# Altium PCB WirelessLamp.PcbDoc (part 2 of 2)
Units mm, origin at the board's own origin, x right, y up, seen from the top; angles counter-clockwise.
Board outline 95.76 x 95.69 mm, 2 copper layers (Top Layer, Bottom Layer); 124 components, 86 nets, 387 pads, 228 vias.
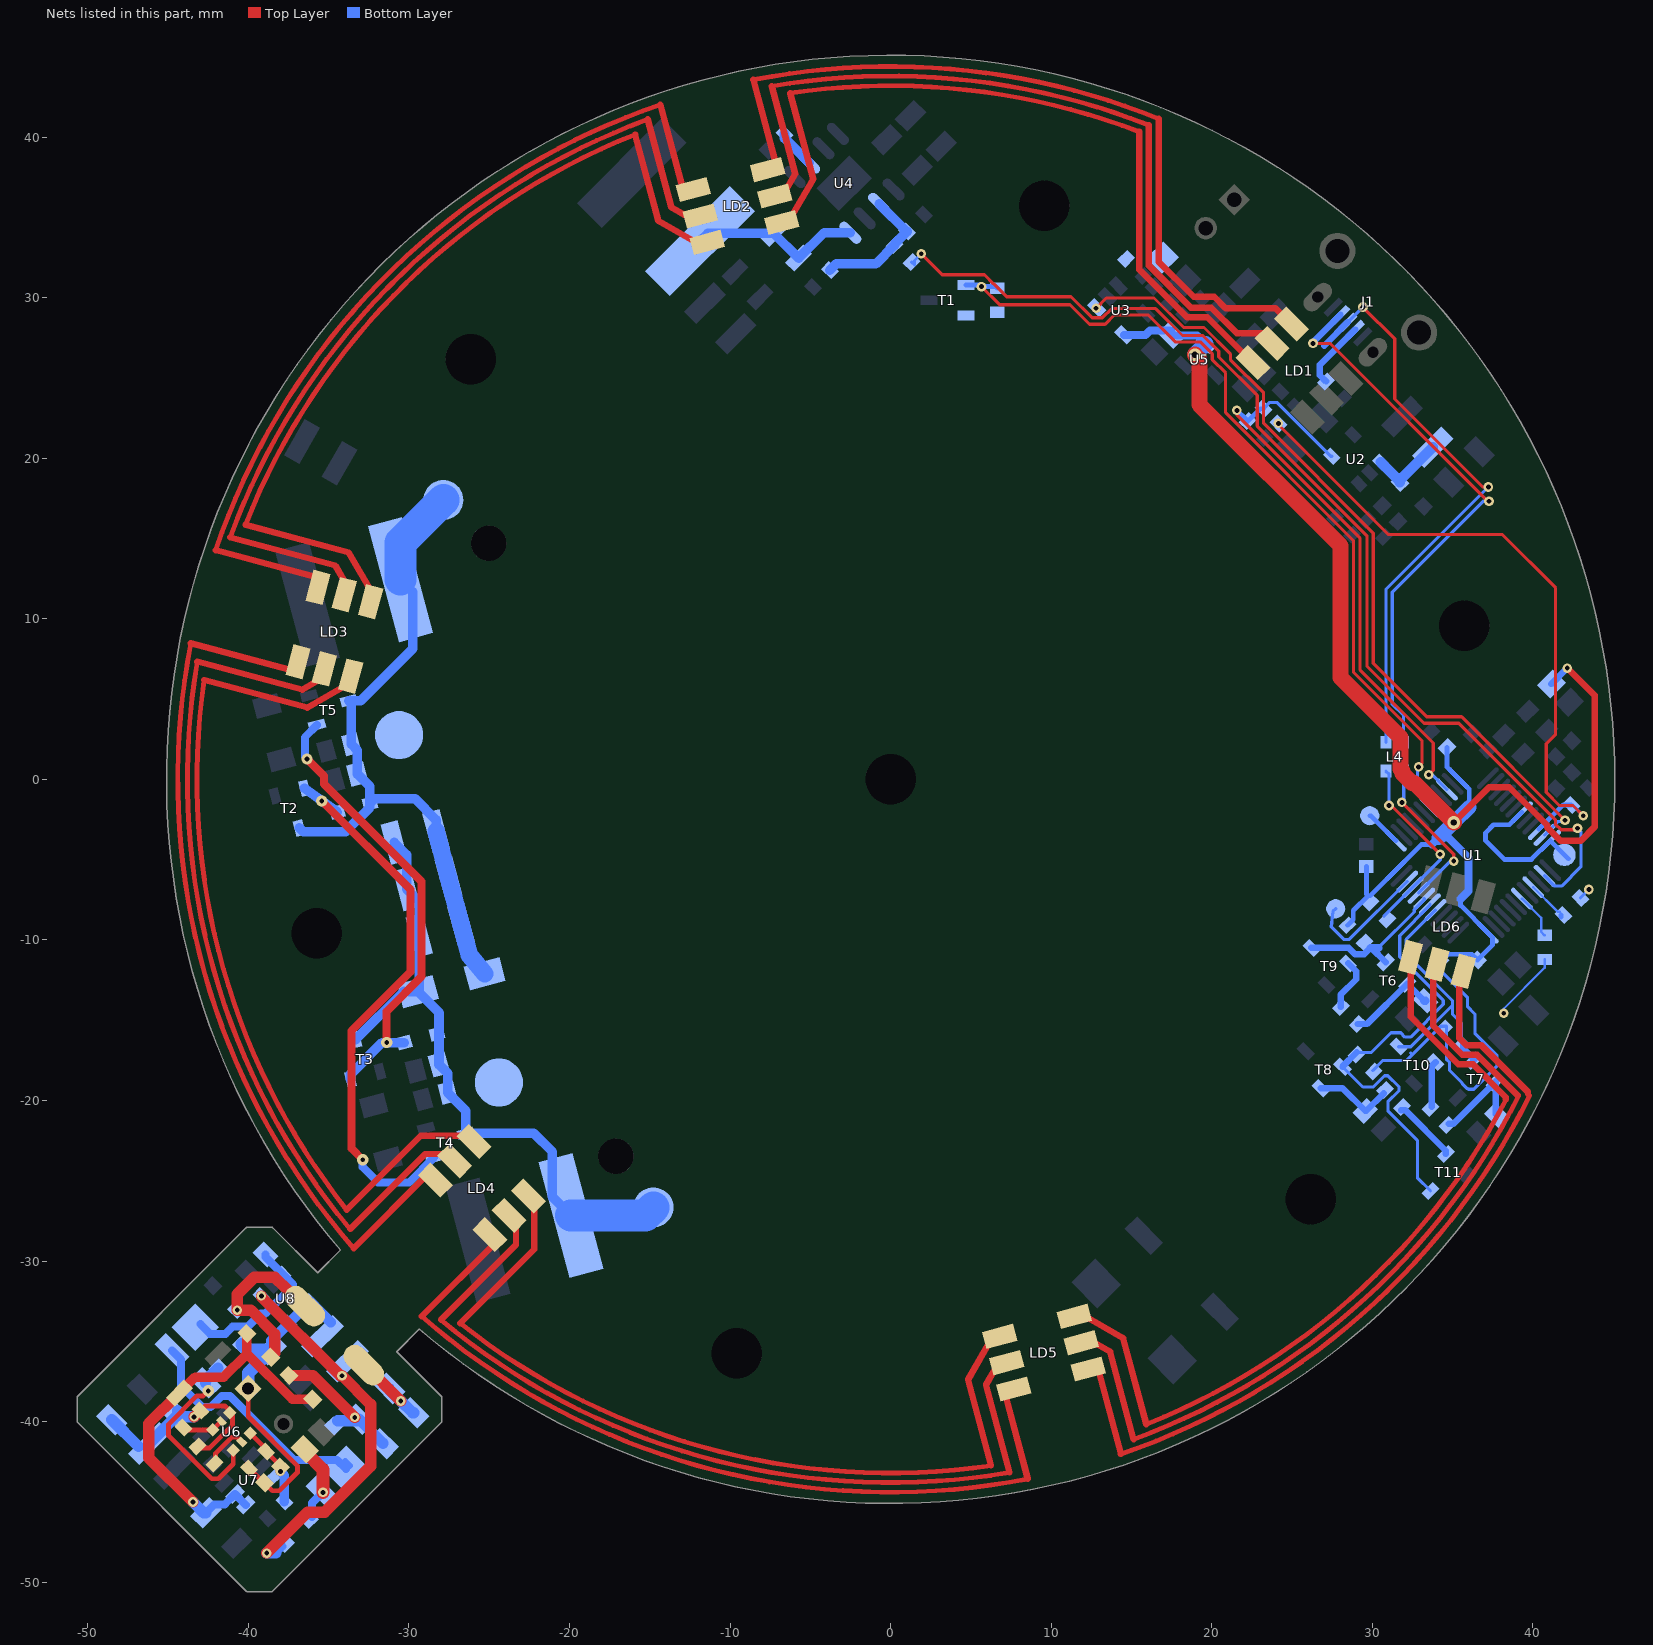
[diagram p2: the nets of this part, all layers, seen from the top]

## Via types
v1: diameter 0.7, hole 0.3, Top Layer to Bottom Layer, tented both sides, 104 vias
v2: diameter 0.8, hole 0.4, Top Layer to Bottom Layer, tented both sides, 71 vias
v3: diameter 0.6, hole 0.3, Top Layer to Bottom Layer, tented both sides, 41 vias
v4: diameter 0.6, hole 0.3, Top Layer to Bottom Layer, tented top, 9 vias
v5: diameter 0.7, hole 0.3, Top Layer to Bottom Layer, tented top, 1 vias
v6: diameter 0.6, hole 0.3, Top Layer to Bottom Layer, tented bottom, 1 vias
v7: diameter 0.6, hole 0.3, Top Layer to Bottom Layer, 1 vias

## Nets (pads, with @x,y where several pads share a name; then routed paths per layer and width w, separated by ;. In a path a pad name is that pad's centre, name@x,y a point inside that pad or via, vN(x,y) a via of type N, cw(c..) or ccw(c..) an arc to the next point about the centre after c; other vN are vias at no path point) (continued)
NetC28_1: C28.1 D13.2 LD7.2 | length 4.7
  Top Layer w0.8: C28.1@-36.418,-41.933 -35.357,-42.994 v4(-35.357,-44.408)
  Bottom Layer w0.5: D13.2@-36.029,-45.928 -36.029,-45.08 v4(-35.357,-44.408)
NetC29_1: C29.1 C30.2 D9.1 D14.2 | length 8.7
  Top Layer w0.7: D9.1@-37.478,-37.125 -35.99,-37.125 v4(-33.375,-39.739)
  Bottom Layer w0.5: C30.2@-33.223,-39.953 C30.2@-33.115,-39.846 ; C29.1@-31.609,-41.367 C29.1@-31.609,-41.352
  Bottom Layer w0.7: -34.435,-39.953 C30.2@-33.223,-39.953 ; C30.2@-33.115,-39.846 C29.1@-31.609,-41.352
NetC31_2: C31.2 D9.2 D11.2 D15.2 U7.4 U7.5 | length 25.1
  Top Layer w0.6: D11.2@-44.373,-38.15 D11.2@-44.231,-38.15 ; D11.2@-44.302,-38.221 D11.2@-44.231,-38.15 ; D11.2@-44.09,-38.15 D11.2@-44.231,-38.15 ; D15.2@-40.095,-34.508 -40.095,-34.968 -40.095,-35.781 ; D9.2@-35.993,-38.61 -37.266,-38.61 -40.095,-35.781 ; D11.2@-44.231,-38.15 -43.312,-37.231 -41.544,-37.231 -40.095,-35.781
  Top Layer w0.7: D11.2@-44.302,-38.221 -46.211,-40.13 -46.211,-42.251 v3(-43.453,-45.009)
  Bottom Layer w0.5: C31.2@-42.64,-45.681 -42.11,-45.15 -41.473,-45.15 U7.5@-40.837,-44.514 U7.4@-40.165,-45.186
  Bottom Layer w0.7: v3(-43.453,-45.009) -42.782,-45.681 C31.2@-42.64,-45.681
NetC32_2: C32.2 L8.2 R31.2 R32.1 R33.1 U6.4 | length 12.8
  Top Layer w0.3: R32.1@-43.277,-41.65 -42.428,-41.65 -40.982,-40.204 -40.982,-39.631 U6.4@-41.155,-39.458 -41.155,-39.317 -41.44,-39.032 -42.709,-39.032 R31.2@-42.994,-39.317
  Top Layer w0.7: v6(-43.383,-39.706) R31.2@-42.994,-39.317
  Bottom Layer w0.7: C32.2@-48.509,-39.882 L8.2@-46.839,-41.553 ; L8.2@-46.174,-41.366 -44.408,-39.6 -44.408,-39.317 -44.019,-39.706 v6(-43.383,-39.706)
NetC34_1: C34.1 R34.1 R35.2 U6.3 U7.3 | length 5.1
  Top Layer w0.3: U6.3@-39.882,-40.731 -39.034,-41.579 -39.034,-41.721 C34.1@-38.009,-42.746
  Top Layer w0.6: v7(-38.009,-43.1) C34.1@-38.009,-42.746
  Bottom Layer w0.6: v7(-38.009,-43.1) -37.761,-43.347 R35.2@-37.761,-44.974
NetD2_1: D2.1 L3.2 U2.1 | length 4.7
  Bottom Layer w0.65: U2.1@30.512,19.764 D2.1@31.714,18.562 ; D2.1@31.714,18.491 D2.1@31.714,18.562 ; L3.2@33.764,20.683 31.714,18.632 D2.1@31.714,18.562
NetD4_1: D4.1 T2.2 T4.1 | length 34.9
  Top Layer w0.5: v1(-35.426,-1.344) -29.912,-6.857 -29.912,-11.987 -33.588,-15.662 -33.588,-22.981 v1(-32.88,-23.688)
  Bottom Layer w0.5: v1(-32.88,-23.688) -32.88,-24.138 -31.916,-25.102 -29.985,-25.102 T4.1@-28.442,-23.56
  Bottom Layer w0.6: T2.2@-36.503,-0.552 -35.423,-1.339 D4.1@-34.46,-2.04
NetD5_1: D5.1 T3.2 T5.1 | length 28.5
  Top Layer w0.5: v1(-36.345,1.273) -35.285,0.212 -35.285,-0.283 -29.212,-6.355 -29.212,-12.277 -31.384,-14.449 v1(-31.384,-16.394)
  Bottom Layer w0.5: v1(-36.345,1.273) -36.487,1.414 -36.487,2.62 T5.1@-35.725,3.381
  Bottom Layer w0.6: T3.2@-33.642,-18.681 -33.642,-18.368 -31.667,-16.394 v1(-31.384,-16.394) D5.1@-30.288,-16.394
NetD7_1: D7.1 D8.1 L5.2 U4.8 | length 10.9
  Bottom Layer w0.6: L5.2@-11.879,33.517 -11.384,34.012 D8.1@-7.283,34.012 D7.1@-5.728,32.456 -4.14,34.044 U4.8@-2.514,34.044
NetD12_1: D12.1 R33.2 U6.1 | length 11.7
  Top Layer w0.3: v5(-42.497,-38.086) -42.812,-38.401 -43.209,-38.401 -44.972,-40.164 -44.972,-40.871 -42.285,-43.558 -41.861,-43.558 -40.943,-42.64 U6.1@-40.943,-41.792
  Bottom Layer w0.7: R33.2@-42.674,-37.583 -42.674,-37.441 D12.1@-41.896,-36.663
NetD13_1: D13.1 L7.2 U8.1 | length 23.4
  Top Layer w0.7: v4(-39.19,-32.173) -39.19,-32.231 -34.282,-37.139 v4(-34.169,-37.139) -32.385,-38.923 -32.385,-42.78 -35.251,-45.645 -36.312,-45.645 v3(-38.857,-48.191)
  Bottom Layer w0.5: -38.291,-48.191 D13.1@-37.867,-47.767
  Bottom Layer w0.7: v3(-38.857,-48.191) -38.291,-48.191
NetJ1_2: J1.2 L4.4 | length 35.5
  Top Layer w0.2: v3(26.304,27.153) 27.365,27.153 v3@37.229,17.289
  Bottom Layer w0.2: L4.4@31.946,2.314 31.946,3.975 31.246,4.675 31.246,11.661 36.909,17.324 v3(37.265,17.324)
  Bottom Layer w0.4: v3(26.304,27.153) 26.304,27.224 J1.2@28.019,28.938
NetJ1_3: J1.3 L4.1 | length 36.6
  Top Layer w0.2: v3(29.416,29.416) 31.396,27.436 31.396,23.688 36.875,18.209 v3(37.228,18.209)
  Bottom Layer w0.2: J1.3@28.479,28.479 v3(29.416,29.416) ; L4.1@30.846,2.314 30.846,11.826 v3(37.228,18.209)
  Bottom Layer w0.4: 27.011,27.011 J1.3@28.479,28.479
NetJ1_4: J1.4 R11.1 | length 4.3
  Bottom Layer w0.4: R11.1@27.118,24.784 26.729,25.173 26.729,25.809 J1.4@28.938,28.019
NetLD1_4: LD1.4 LD2.3 | length 50.1
  Top Layer w0.3: -8.49,43.581 cw(c0,0) 16.688,41.145
  Top Layer w0.4: -8.545,43.566 LD2.3@-7.088,38.127 ; 16.686,41.145 16.686,32.246 18.88,30.052 20.153,30.052 20.86,29.345 23.971,29.345 LD1.4@24.961,28.355
NetLD1_5: LD1.5 LD2.2 | length 50
  Top Layer w0.3: -7.404,43.17 cw(c0,0) 16.05,40.753
  Top Layer w0.4: -7.404,43.17 -5.941,37.71 -6.648,36.485 LD2.2@-7.228,36.33 ; 16.086,40.753 16.086,31.998 18.704,29.379 19.977,29.379 21.567,27.789 23.122,27.789 LD1.5@23.759,27.153
NetLD1_6: LD1.6 LD2.1 | length 49.1
  Top Layer w0.3: -6.253,42.745 cw(c0,0) 15.432,40.35
  Top Layer w0.4: LD2.1@-6.788,34.688 -6.305,34.817 -4.82,37.389 -6.25,42.728 ; 15.486,40.35 15.486,31.749 18.455,28.779 19.728,28.779 LD1.6@22.557,25.951
NetLD2_4: LD2.4 LD3.3 | length 53
  Top Layer w0.3: -42.05,14.252 cw(c0,0) -42.041,14.279 cw(c0,0) -14.343,42.019
  Top Layer w0.4: -42.043,14.28 -42.041,14.279 LD3.3@-35.514,12.53 ; -14.341,42.014 LD2.4@-12.884,36.575
NetLD2_5: LD2.5 LD3.2 | length 54.3
  Top Layer w0.3: -41.095,15.155 cw(c0,0) -15.132,41.103
  Top Layer w0.4: -41.118,15.067 -34.579,13.315 -33.872,12.09 LD3.2@-34.027,11.511 ; -15.134,41.108 -15.132,41.103 -13.668,35.64 -12.444,34.932 LD2.5@-11.864,35.088
NetLD2_6: LD2.6 LD3.1 | length 54.5
  Top Layer w0.3: -40.173,15.886 cw(c0,0) -15.915,40.161 cw(c0,0) -15.897,40.169
  Top Layer w0.4: -40.182,15.852 -33.741,14.126 -32.256,11.554 LD3.1@-32.385,11.071 ; -15.916,40.164 -15.915,40.161 -14.479,34.801 -11.907,33.316 LD2.6@-11.424,33.446
NetLD3_4: LD3.4 LD4.3 | length 53.7
  Top Layer w0.3: -43.591,8.437 ccw(c0,0) -33.45,-29.197
  Top Layer w0.4: -43.58,8.48 LD3.4@-37.067,6.735 ; -33.445,-29.202 LD4.3@-28.779,-24.537
NetLD3_5: LD3.5 LD4.2 | length 55.1
  Top Layer w0.3: -43.185,7.315 ccw(c0,0) -33.689,-27.991
  Top Layer w0.4: -43.179,7.337 -36.649,5.588 -35.425,6.295 LD3.5@-35.269,6.874 ; -33.658,-28.001 -28.991,-23.335 -27.577,-23.335 LD4.2@-27.153,-23.759
NetLD3_6: LD3.6 LD4.1 | length 55.2
  Top Layer w0.3: -42.763,6.129 ccw(c0,0) -33.878,-26.805
  Top Layer w0.4: -42.748,6.186 -36.329,4.466 -33.757,5.951 LD3.6@-33.627,6.434 ; -33.87,-26.799 -29.274,-22.203 -26.304,-22.203 LD4.1@-25.951,-22.557
NetLD4_4: LD4.4 LD5.3 | length 52.7
  Top Layer w0.3: -29.202,-33.445 ccw(c0,0) 8.546,-43.57
  Top Layer w0.4: -29.202,-33.445 LD4.4@-24.537,-28.779 ; LD5.3@7.088,-38.127 8.544,-43.56
NetLD4_5: LD4.5 LD5.2 | length 54.1
  Top Layer w0.3: -28.012,-33.671 ccw(c0,0) 7.404,-43.17
  Top Layer w0.4: -28.001,-33.658 -23.335,-28.991 -23.335,-27.577 LD4.5@-23.759,-27.153 ; LD5.2@7.228,-36.33 6.648,-36.485 5.941,-37.71 7.404,-43.17
NetLD4_6: LD4.6 LD5.1 | length 54.2
  Top Layer w0.3: -26.823,-33.864 ccw(c0,0) 6.254,-42.745
  Top Layer w0.4: -26.799,-33.87 -22.203,-29.274 -22.203,-26.304 LD4.6@-22.557,-25.951 ; 6.252,-42.735 4.82,-37.389 6.305,-34.817 LD5.1@6.788,-34.688
NetLD5_4: LD5.4 LD6.3 | length 50.4
  Top Layer w0.3: 14.348,-42.018 ccw(c0,0) 39.797,-19.686
  Top Layer w0.4: LD5.4@12.884,-36.575 14.343,-42.019 ; LD6.3@35.669,-11.951 35.426,-12.194 35.426,-16.122 35.852,-16.548 36.772,-16.548 39.103,-18.88 ; 39.104,-18.88 39.693,-19.469 39.693,-19.582
NetLD5_5: LD5.5 LD6.2 | length 51.5
  Top Layer w0.3: 15.143,-41.099 ccw(c0,0) 39.105,-19.729
  Top Layer w0.4: LD5.5@11.864,-35.088 12.444,-34.932 13.668,-35.64 15.132,-41.102 ; LD6.2@34.027,-11.511 33.8,-11.738 33.8,-15.344 35.604,-17.148 36.523,-17.148 36.699,-17.324 39.047,-19.672
NetLD5_6: LD5.6 LD6.1 | length 51.7
  Top Layer w0.3: 15.932,-40.155 ccw(c0,0) 38.321,-19.944
  Top Layer w0.4: LD5.6@11.424,-33.446 11.907,-33.316 14.479,-34.801 15.915,-40.159 ; LD6.1@32.385,-11.071 32.385,-14.778 35.355,-17.748 36.275,-17.748 38.316,-19.79 38.316,-19.939
NetLD7_1: LD7.1 LD8.2 | length 15.9
  Bottom Layer w0.4: LD8.2@-44.445,-35.957 LD8.2@-44.38,-36.021 ; LD7.1@-33.978,-42.463 LD7.1@-33.695,-42.746
  Bottom Layer w0.5: LD8.2@-44.761,-35.569 -44.194,-36.136 -44.194,-37.763 -42.854,-39.103 -42.356,-39.103 -41.66,-38.407 -41.146,-38.407 -37.16,-42.393 -34.473,-42.393 LD7.1@-33.907,-42.958
NetLD8_1: LD8.1 R36.2 U8.3 | length 9.9
  Bottom Layer w0.5: LD8.1@-42.995,-33.926 -42.377,-34.544 -41.438,-34.544 -40.977,-34.083 -40.022,-34.083 -39.211,-33.271 -38.94,-33.271 -37.219,-31.55 -37.219,-31.45 -37.304,-31.365 -37.311,-31.365 U8.3@-37.846,-30.83 -38.928,-29.748 R36.2@-38.928,-29.594
NetR2_2: R2.2 R3.2 R9.2 T1.2
NetR13_1: R13.1 R15.2 R16.1 U4.6 | length 8.3
  Bottom Layer w0.6: R13.1@-3.783,31.714 -3.394,32.103 -0.919,32.103 R16.1@0.247,33.269 0.247,33.34 R15.2@1.025,34.118 1.004,34.118 U4.6@-0.718,35.84
NetR14_2: R14.2 U4.2 | length 2.4
  Bottom Layer w0.6: R14.2@-6.611,40.199 -6.611,39.937 U4.2@-5.081,38.406
NetR17_1: R17.1 U1.18 | length 2.9
  Bottom Layer w0.15: U1.18@39.315,-7.425 40.517,-8.627 40.517,-9.503 R17.1@40.729,-9.715
NetR18_1: R18.1 R19.2 U1.10 | length 41.1
  Top Layer w0.2: v4@24.112,22.132 30.996,15.249 38.088,15.249 41.412,11.925 41.412,2.804 40.836,2.228 40.836,-0.814 41.649,-1.626 42.497,-1.626 v3(43.134,-2.263)
  Bottom Layer w0.2: R19.2@42.391,-1.591 42.462,-1.591 v3(43.134,-2.263)
  Bottom Layer w0.3: U1.10@40.376,-3.111 41.896,-1.591 R19.2@42.391,-1.591
  other v4: 24.148,22.168
NetR23_2: R23.2 U1.16 | length 2.4
  Bottom Layer w0.15: U1.16@40.022,-6.718 41.543,-8.238 R23.2@41.684,-8.238
  Bottom Layer w0.3: R23.2@41.755,-8.591 R23.2@41.755,-8.45
NetR24_1: R24.1 R28.1 T6.2 | length 5.7
  Bottom Layer w0.4: R24.1@29.097,-15.238 29.663,-15.238 T6.2@32.173,-12.728 R28.1@33.234,-13.789
  Bottom Layer w0.5: R28.1@33.234,-13.789 R28.1@33.305,-13.789
NetR24_2: R24.2 T9.1 | length 3.3
  Bottom Layer w0.4: R24.2@28.037,-14.177 28.037,-13.4 28.991,-12.445 28.991,-11.95 T9.1@28.496,-11.455
NetR25_1: R25.1 R29.2 T7.2 | length 6.1
  Bottom Layer w0.4: R25.1@34.754,-21.461 35.037,-21.461 T7.2@37.618,-18.88 37.689,-18.809 R29.2@37.689,-20.86
NetR25_2: R25.2 T10.1 | length 2.9
  Bottom Layer w0.4: R25.2@33.694,-20.4 33.694,-17.854 T10.1@33.941,-17.607
NetR26_1: R26.1 R30.2 T8.2 | length 5
  Bottom Layer w0.4: T8.2@26.799,-19.233 28.143,-19.233 R30.2@29.557,-20.648 29.628,-20.648 R26.1@30.724,-19.552
NetR26_2: R26.2 T11.1 | length 4
  Bottom Layer w0.4: R26.2@31.784,-20.612 32.067,-20.612 34.578,-23.122 T11.1@34.578,-23.335
NetR31_1: R31.1 U6.5 U6.6 | length 2.6
  Top Layer w0.3: R31.1@-44.054,-40.377 -43.913,-40.519 U6.6@-42.216,-40.519 U6.5@-41.686,-39.988
NetR32_2: R32.2 U6.2 | length 3
  Top Layer w0.3: R32.2@-42.216,-42.711 R32.2@-42.108,-42.603 -42.039,-42.534 -42.039,-41.968 -41.049,-40.978 -40.696,-40.978 U6.2@-40.413,-41.261
PWM_Blue: R22.1 T8.1 T11.3 U1.30 | length 28.7
  Bottom Layer w0.2: T8.1@28.143,-17.89 29.416,-19.163 30.052,-19.163 30.759,-18.455 30.971,-18.455 31.66,-19.144 31.66,-19.393 30.971,-20.082 30.971,-20.648 32.81,-22.486 32.81,-24.819 T11.3@33.623,-25.633 ; R22.1@29.027,-17.006 29.946,-17.006 31.165,-15.787 31.767,-15.787 32.032,-16.051 32.385,-16.051 34.418,-14.019 34.418,-13.77 31.703,-11.055 31.703,-9.734 33.588,-7.849 U1.30@33.588,-7.778
  Bottom Layer w0.4: T8.1@28.143,-17.89 R22.1@29.027,-17.006
PWM_Green: R20.1 T6.1 T9.3 U1.31 | length 10
  Bottom Layer w0.2: 30.37,-10.501 32.607,-8.264 32.607,-8.122 33.234,-7.495 U1.31@33.234,-7.425
  Bottom Layer w0.4: T9.3@26.198,-10.501 26.209,-10.489 28.521,-10.489 28.921,-10.889 29.486,-10.889 29.875,-10.501 ; 29.946,-10.501 T6.1@30.83,-11.384
  Bottom Layer w0.5: 29.875,-10.501 29.946,-10.501 30.37,-10.501
PWM_Red: R21.1 T7.1 T10.3 U1.29 | length 16.1
  Bottom Layer w0.2: T10.3@31.643,-16.652 32.403,-16.652 34.993,-14.063 ; U1.29@33.941,-8.132 32.103,-9.97 32.103,-10.889 34.993,-13.78 34.993,-14.063 ; R21.1@35.532,-16.299 35.532,-15.167 34.993,-14.628 34.993,-14.063
  Bottom Layer w0.4: R21.1@35.674,-16.44 35.674,-16.794 36.345,-17.466 T7.1@36.275,-17.466
Reset: pad.26 U1.7 U1.12 | length 9.9
  Bottom Layer w0.3: U1.7@39.315,-2.051 38.537,-2.828 37.547,-2.828 37.052,-3.323 37.052,-3.818 38.224,-4.99 39.911,-4.99 U1.12@41.083,-3.818 pad.26@41.967,-4.702 pad.26@42.214,-4.95
RxCoil+: C29.2 C30.1 pad.3 | length 5.4
  Top Layer w0.7: pad.3@-32.81,-36.487 -32.742,-36.487 v4(-30.513,-38.716)
  Bottom Layer w0.7: C30.1@-31.206,-37.937 -31.206,-38.023 v4(-30.513,-38.716) -29.786,-39.443 C29.2@-29.7,-39.443
RxCoil-: D15.1 D16.2 pad.4 | length 10.8
  Top Layer w0.7: D15.1@-38.61,-35.993 -38.362,-35.746 -38.362,-34.544 -39.847,-33.059 v4(-40.696,-33.059) -40.696,-32.069 -39.635,-31.008 -38.362,-31.008 pad.4@-36.557,-32.739
RxPow: C33.2 C34.2 D12.2 L7.1 pad.1 R34.2 U8.4 U8.5 | length 22.2
  Top Layer w0.3: R34.2@-40.095,-42.64 -40.095,-42.782 R34.2@-39.953,-42.923 C34.2@-39.175,-43.701 ; pad.1@-40.011,-37.941 -40.011,-39.683 -36.948,-42.746 -36.948,-43.17 -38.079,-44.302 -38.504,-44.302 C34.2@-38.999,-43.807 C34.2@-39.14,-43.665
  Bottom Layer w0.5: pad.1@-39.761,-38.191 pad.1@-39.761,-37.941
  Bottom Layer w0.65: C33.2@-38.573,-35.532 -38.573,-34.95 U8.5@-37.493,-33.87 U8.4@-36.149,-32.527 L7.1@-34.874,-33.802
  Bottom Layer w0.8: D12.2@-40.411,-35.179 -40.058,-35.532 C33.2@-38.573,-35.532 -40.011,-36.97 pad.1@-40.011,-37.941 pad.1@-39.761,-37.941
Sense_Out: U1.11 U3.1 | length 50.9
  Top Layer w0.2: v4(12.799,29.345) 13.435,29.981 16.405,29.981 18.243,28.143 19.516,28.143 21.161,26.498 21.161,26.145 23.227,24.078 23.227,22.169 30.062,15.334 30.062,7.224 33.387,3.899 35.557,3.899 v3(42.002,-2.546)
  Bottom Layer w0.2: v4(12.799,29.345) U3.1@12.834,29.38 U3.1@12.834,29.451 ; U1.11@40.729,-3.465 41.578,-2.616 v3@42.144,-2.616
StepUp_Enable: R1.1 R5.2 U1.46 U2.4 | length 37.6
  Top Layer w0.2: v3(21.567,22.981) 21.567,22.698 29.228,15.037 29.228,6.835 33.8,2.263 33.8,0.566 v3(33.517,0.283)
  Bottom Layer w0.2: R1.1@23.228,23.087 23.617,23.476 24.042,23.476 27.4,20.117 U2.4@27.471,20.117 ; v3(33.517,0.283) 33.729,0.283 U1.46@34.648,-0.636
  Bottom Layer w0.3: v3(21.567,22.981) 22.168,22.38 22.168,22.239 R5.2@22.239,22.309 23.016,23.087 R1.1@23.228,23.087
SWCLK: pad.25 U1.37 | length 2.3
  Bottom Layer w0.3: pad.25@29.84,-2.263 29.911,-2.263 U1.37@31.466,-3.818
SWDIO: pad.23 U1.34 | length 7.8
  Bottom Layer w0.2: pad.23@27.719,-8.061 27.546,-8.199 27.436,-9.192 28.214,-9.97 28.567,-9.97 U1.34@32.173,-6.364
Touch_Button: R23.1 | length 0.8
  Bottom Layer w0.2: R23.1@42.957,-7.389 v3(43.487,-6.859)
Touch_Shield: R17.2 | length 4.4
  Bottom Layer w0.15: v3(38.184,-14.566) 38.184,-14.284 40.729,-11.738 R17.2@40.729,-11.215
Transmitter_Enable: R2.1 T1.1 U1.43 | length 52.9
  Top Layer w0.2: v3(5.657,30.688) 6.788,29.557 11.172,29.557 12.384,28.345 13.354,28.345 13.93,28.921 16.051,28.921 17.726,27.246 19.282,27.246 20.033,26.494 20.033,26.141 20.86,25.314 20.86,22.84 28.828,14.871 28.828,6.669 33.093,2.404 33.093,0.99 v3(32.88,0.778)
  Bottom Layer w0.2: v3(32.88,0.778) 32.941,0.839 32.961,0.839 32.81,0.688 32.81,-0.919 U1.43@33.588,-1.697
  Bottom Layer w0.3: T1.1@4.686,30.79 5.555,30.79 v3(5.657,30.688) 6.548,30.688 R2.1@6.647,30.59
TxCore1: C1.2 C2.2 C3.2 C5.1 D1.1 D4.2 L2.2 pad.30 pad.32 R7.1 T2.3 T5.3 | length 42.2
  Bottom Layer w0.6: T2.3@-36.825,-3.02 -36.593,-3.253 -33.941,-3.253 -32.432,-1.743 D4.2@-32.432,-1.496 ; L2.2@-29.769,11.691 -29.769,8.132 -33.007,4.894 T5.3@-33.75,4.894 -33.593,4.737 R7.1@-33.593,2.187 -33.217,1.811 C5.1@-33.217,0.336 -32.432,-0.449 D4.2@-32.432,-1.496 ; C3.2@-28.309,-3.229 -28.309,-2.521 -29.628,-1.202 -32.138,-1.202 D4.2@-32.432,-1.496
  Bottom Layer w1.1: C3.2@-28.309,-3.229 C1.2@-27.533,-6.127 C2.2@-26.756,-9.025 -26.234,-10.96 D1.1@-25.288,-12.101
  Bottom Layer w2: L2.2@-30.52,12.442 -30.52,14.735 pad.30@-27.86,17.395
TxCore2: C1.1 C2.1 C3.1 C7.1 D1.2 D5.2 L1.1 pad.29 pad.31 R8.1 T3.3 T4.3 | length 40.8
  Bottom Layer w0.6: T3.3@-33.32,-16.213 -30.32,-13.214 D1.2@-29.442,-13.214 ; C3.1@-30.917,-3.928 -30.141,-4.705 C1.1@-30.141,-6.826 -29.364,-7.602 -29.364,-13.136 D1.2@-29.442,-13.214 ; L1.1@-19.908,-27.161 -21.072,-25.998 -21.072,-23.193 -22.218,-22.047 T4.3@-26.466,-22.047 -26.466,-20.637 R8.1@-27.582,-19.521 -27.582,-18.31 C7.1@-28.126,-17.766 -28.126,-14.53 D1.2@-29.442,-13.214
  Bottom Layer w2: L1.1@-19.908,-27.161 -15.282,-27.161 pad.29@-14.779,-26.658
USB_D_N: L4.3 U1.32 | length 10
  Top Layer w0.2: v3(31.842,-1.436) 31.961,-1.556 35.072,-4.667 v3(35.072,-5.091)
  Bottom Layer w0.2: v3(31.842,-1.436) 31.961,-1.317 L4.3@31.961,0.514 ; U1.32@32.88,-7.071 34.86,-5.091 v3(35.072,-5.091)
USB_D_P: L4.2 R12.2 U1.33 | length 12
  Top Layer w0.2: v3(31.042,-1.626) 31.183,-1.626 v3(34.224,-4.667)
  Bottom Layer w0.2: R12.2@30.724,-8.521 U1.33@32.527,-6.718 34.224,-5.02 v3(34.224,-4.667) ; L4.2@30.846,0.514 31.042,0.318 v3(31.042,-1.626)
VCC: C18.2 C19.2 C20.2 C21.2 L6.1 R12.1 R20.2 R21.2 R22.2 R27.2 U1.24 U1.36 U1.48 U3.5 U5.2 | length 116.4
  Top Layer w0.4: v2(35.072,-2.687) 37.265,-0.495 38.537,-0.495 40.902,-2.86 40.902,-3.001 41.719,-3.818 42.992,-3.818 43.841,-2.97 43.841,5.233 v3(42.144,6.93)
  Top Layer w1: v2(18.95,26.446) 19.233,26.163 19.233,23.335 28.028,14.54 28.028,6.338 31.749,2.616 31.749,0.636 31.88,0.505 31.88,0.364 32.466,-0.222 32.608,-0.222 v2(35.072,-2.687)
  Bottom Layer w0.2: R22.2@30.017,-18.137 30.636,-17.518 32.121,-17.518 34.259,-15.38 34.613,-15.38 34.613,-17.43 34.807,-17.624 34.807,-18.119 35.567,-18.88 ; 32.374,-17.052 32.403,-17.052 ; R27.2@34.259,-11.349 34.259,-11.815 34.301,-11.815 34.301,-11.956 35.921,-13.576 35.921,-14.142 36.392,-14.613 36.392,-15.815 37.76,-17.183 37.76,-17.864 36.32,-19.304 35.992,-19.304 35.955,-19.268 35.92,-19.268 35.603,-18.951
  Bottom Layer w0.3: R20.2@28.461,-9.086 28.815,-8.733 28.815,-8.167 29.734,-7.248 ; C21.2@29.628,-5.438 29.628,-7.142 29.734,-7.248 ; 33.704,-4.056 33.067,-4.056 U1.36@31.466,-5.657 29.875,-7.248 29.734,-7.248 ; R27.2@34.259,-11.349 34.719,-10.889 36.204,-10.889 C20.2@36.557,-11.243 37.477,-10.324 37.477,-9.829 U1.24@37.194,-9.546 35.497,-7.849 35.497,-7.444 ; C19.2@34.648,1.98 34.648,0.778 U1.48@35.355,0.071 36.032,-0.606 36.032,-1.727
  Bottom Layer w0.4: L6.1@41.154,5.94 v3(42.144,6.93)
  Bottom Layer w0.5: U3.5@14.531,27.683 15.875,27.683 16.148,27.956 17.44,27.956 17.501,27.895 C18.2@17.501,27.683 17.536,27.648 19.092,27.648 U5.2@19.622,27.118 ; 33.704,-4.056 34.126,-3.633 34.746,-3.633 35.992,-4.879 35.992,-6.949 35.497,-7.444
  Bottom Layer w0.9: 34.126,-3.633 v2(35.072,-2.687) 36.032,-1.727
  Bottom Layer w1: v2@18.986,26.481 U5.2@19.622,27.118
Voltage_Control: R16.2 U1.14 | length 69.4
  Top Layer w0.2: v3(1.909,32.739) 3.218,31.43 5.844,31.43 6.398,30.876 6.41,30.876 7.224,30.062 11.233,30.062 12.55,28.745 13.189,28.745 13.764,29.321 16.5,29.321 18.175,27.646 19.447,27.646 20.433,26.66 20.433,26.306 22.827,23.912 22.827,22.003 29.662,15.168 29.662,7.058 33.221,3.499 35.392,3.499 41.402,-2.511 41.402,-2.794 41.754,-3.146 42.675,-3.146 v3(42.78,-3.041)
  Bottom Layer w0.2: R16.2@1.308,32.209 1.485,32.032 1.485,32.315 v3(1.909,32.739) ; U1.14@40.729,-6.01 41.366,-6.647 41.79,-6.647 42.992,-5.445 42.992,-3.253 42.921,-3.182 42.639,-3.182 v3(42.78,-3.041)
pads on no net: U1.1 U1.2 U1.3 U1.4 U1.13 U1.15 U1.20 U1.21 U1.22 U1.25 U1.26 U1.27 U1.38 U1.39 U1.40 U1.41 U1.42 U1.44 U1.45 U4.7

## Polygon pours and split planes (outlines as drawn)
GND on Bottom Layer "RxGndB" (solid, remove dead copper, pour order 76): -34.768,-31.784 -38.561,-27.991 -40.061,-27.991 -50.561,-38.491 -50.561,-39.991 -40.061,-50.491 -38.561,-50.491 -28.061,-39.991 -28.061,-38.491
TxCore1 on Bottom Layer "BottomTX1" (solid, remove dead copper, pour order 72): -30.193,16.758 -27.153,5.374 -23.264,-13.93 -26.658,-14.779 -30.335,-1.909 -32.88,-2.616 -33.093,-2.687 -34.86,3.748 -34.931,6.081 -34.012,7.425 -30.901,8.273 -33.022,16.051
10V on Bottom Layer "Bottom10V" (solid, remove dead copper, pour order 70): -37.485,16.655 -36.178,15.349 -33.927,6.874 -34.334,6.467 -40.987,6.467 ccw(c-41.001,6.418) -41.05,6.426 ccw(c0,0) -40.765,-8.04 -41.17,-8.446 ccw(c-41.135,-8.481) -41.184,-8.492 ccw(c0.002,0.001) -39.963,-13.085 ccw(c-39.915,-13.069) -39.935,-13.115 -39.339,-13.376 ccw(c0,0) -31.39,-27.223 ccw(c-31.352,-27.19) -31.318,-27.227 -28.536,-24.446 -25.565,-24.446 -23.456,-32.463 -23.456,-34.719 -25.369,-36.632 ccw(c-25.416,-36.649) -25.387,-36.608 cw(c0,0) -22.982,38.164 ccw(c-23.019,38.211) -22.961,38.225 -13.974,29.239 ccw(c-13.939,29.274) -13.938,29.224 -13.294,29.224 ccw(c-13.293,29.274) -13.258,29.239 -9.525,32.972 -8.577,32.972 -6.485,30.88 -6.485,30.497 -8.223,28.759 -9.758,28.759 ccw(c-9.758,28.709) -9.794,28.744 -12.233,26.304 -17.161,26.304 -24.063,33.206 ccw(c-24.098,33.171) -24.128,33.211 ccw(c0,0) -37.495,16.711 ccw(c-37.449,16.691)
NetD7_1 on Bottom Layer "Bottom10VInd" (solid, remove dead copper, pour order 69): -0.707,33.093 -3.465,35.85 -8.697,35.85 -10.041,37.194 -15.556,31.678 -15.556,31.396 -13.789,29.628 -13.364,29.628 -9.829,33.163 -8.415,33.163 -6.576,31.325 -5.02,31.325 -3.818,32.527 -1.273,32.527
TxCore2 on Bottom Layer "BottomTX2" (solid, remove dead copper, pour order 71): -17.395,-30.264 -20.294,-18.88 -23.688,-14.213 -26.737,-15.031 -30.414,-2.161 -32.385,-2.687 -30.052,-11.102 -31.82,-12.869 -30.335,-14.354 -28.567,-20.506 -27.86,-20.365 -26.799,-24.112 -22.627,-23.052 -20.223,-31.961 -17.253,-30.971
5V on Bottom Layer "Bottom5V" (solid, remove dead copper, pour order 67): -22.899,38.73 ccw(c-22.859,38.699) -22.895,38.663 -18.279,34.047 ccw(c-18.243,34.083) -18.243,34.032 -17.895,34.032 ccw(c-17.895,34.082) -17.859,34.047 -13.113,38.793 cw(c0,0.001) -6.343,40.455 ccw(c-6.351,40.505) -6.316,40.469 -4.066,38.219 ccw(c-4.031,38.254) -4.03,38.204 -3.889,38.204 ccw(c-3.889,38.254) -3.853,38.219 -2.949,39.123 -2.425,39.123 -2.086,38.785 ccw(c-2.051,38.82) -2.05,38.77 1.061,38.77 ccw(c1.061,38.82) 1.096,38.785 3.118,40.806 ccw(c3.083,40.841) 3.131,40.83 cw(c0,0.001) 22.418,34.268 21.319,33.128 23.723,30.724 20.683,27.684 ccw(c20.718,27.648) 20.683,27.612 21.071,27.224 19.294,25.446 20.496,24.244 21.85,25.597 26.764,20.683 ccw(c26.799,20.718) 26.835,20.683 27.577,21.425 28.602,20.4 ccw(c28.638,20.435) 28.673,20.4 29.649,21.375 30.901,21.375 ccw(c30.901,21.425) 30.936,21.39 32.28,22.733 ccw(c32.244,22.769) 32.28,22.804 31.997,23.087 ccw(c31.961,23.052) 31.961,23.102 29.698,23.102 ccw(c29.698,23.052) 29.663,23.087 28.709,22.133 24.749,26.092 28.815,30.158 ccw(c28.779,30.193) 28.815,30.229 26.223,32.821 27.439,35.683 ccw(c27.392,35.702) 27.423,35.742 ccw(c0,0) -22.885,38.805 ccw(c-22.859,38.761)
NetR2_2 on Bottom Layer "BottomAGNDSense" (solid, remove dead copper, pour order 68): 3.465,26.759 3.465,32.598 6.718,35.85 15.486,35.85 18.597,32.739 16.582,30.724 15.889,31.416 10.212,25.739 9.475,25.739
aGND on Bottom Layer "BottomaGND" (solid, remove dead copper, pour order 74): -22.526,-38.493 cw(c0,0) 5.197,44.296 0,0
GND on Bottom Layer "BotoomGND" (solid, remove dead copper, pour order 78): -31.396,31.396 ccw(c0,0) -31.396,-31.396 ccw(c0,0) 31.396,-31.396 ccw(c0,0) 31.396,31.396 ccw(c0,0)
Touch_Button on Top Layer "TouchSensor" (solid, pour order 79): 44.995,-6.162 41.813,-5.384 39.091,-4.779 37.184,-13.606 43.227,-15
Touch_Shield on Top Layer "TouchShield" (solid, pour order 80): 42.261,-18.126 35.423,-16.119 38.585,-2.481 45.679,-4.384
GND on Top Layer "RxGndT" (solid, remove dead copper, pour order 75): -34.768,-31.784 -38.561,-27.991 -40.061,-27.991 -50.561,-38.491 -50.561,-39.991 -40.061,-50.491 -38.561,-50.491 -28.061,-39.991 -28.061,-38.491
aGND on Top Layer "TopaGND" (solid, remove dead copper, pour order 77): -33.732,-29.177 cw(c0,0) 5.197,44.296 0,0
5V on Top Layer "CapP" (solid, pour order 73): 23.264,36.699 23.547,36.982 22.498,38.026 21.691,38.484 21.178,38.785 19.304,36.911 21.39,34.825
GND on Top Layer "TopGND" (solid, remove dead copper, pour order 81): -31.466,31.183 ccw(c-0.071,-0.212) -31.466,-31.608 ccw(c-0.071,-0.212) 31.325,-31.608 ccw(c-0.071,-0.212) 31.325,31.183 ccw(c-0.071,-0.212)

## Keep-outs
Keep-Out Layer:
  lines w0.2: -34.153,-29.345 -35.68,-30.872 -38.561,-27.991 -40.061,-27.991 -50.561,-38.491 -50.561,-39.991 -40.061,-50.491 -38.561,-50.491 -28.061,-39.991 -28.061,-38.491 -30.907,-35.645 -29.394,-34.131 ; -34.132,-29.326 cw(c0,0) -29.365,-34.098

## Other copper
Top Layer:
  pour cut-out: -21.213,21.213 ccw(c0,0) -21.213,-21.213 ccw(c0,0) 21.213,-21.213 ccw(c0,0) 21.213,21.213 ccw(c0,0)
Bottom Layer:
  pour cut-out: -25.699,-24.675 -21.932,-23.666 -19.913,-31.2 -23.68,-32.209
  pour cut-out: -36.311,14.928 -32.544,15.937 -30.525,8.403 -34.292,7.394
  pour cut-out: -46.918,-42.675 -45.668,-43.925 -43.547,-41.804 -44.797,-40.554
  pour cut-out: -34.19,-33.625 -32.776,-35.039 -35.036,-37.299 -36.45,-35.884
  pour cut-out: 33.305,23.264 34.507,22.062 32.385,19.94 31.183,21.142
  pour cut-out: 41.012,-6.788 42.851,-8.627 41.79,-9.687 39.952,-7.849
  pour cut-out: 37.901,-9.334 39.598,-11.031 41.012,-9.617 39.315,-7.92
  pour cut-out: 38.396,-11.667 37.76,-12.304 38.325,-12.869 37.901,-13.294 37.901,-13.435 38.184,-13.718 37.477,-14.425 37.477,-14.849 38.325,-15.698 40.022,-14.001 40.022,-13.294
  pour cut-out: -9.899,37.052 -12.587,39.739 -18.243,34.083 -15.556,31.396
  pour cut-out: -19.799,19.799 ccw(c0,0) -19.799,-19.799 ccw(c0,0) 19.799,-19.799 ccw(c0,0) 19.799,19.799 ccw(c0,0)

## Silkscreen, mask and mechanical layers (free items; w line width, h text height)
Top Overlay:
  text "+" at 41.578,-11.597 h5 r347.01
Bottom Overlay:
  lines w0.3: 6.992,-35.733 7.018,-36.032
  text "C" at 28.779,-2.051 h2 r315
  text "R" at 43.275,-4.384 h2 r315
  text "D" at 26.658,-7.849 h2 r315
  text "HUlamp" at 11.442,-35.821 h5 r5
  text "Ver. 50c-m" at 9.992,-38.758 h2.8 r5
Bottom Solder:
  region: 26.022,28.214 26.375,27.86 27.224,28.709 26.87,29.062
  region: 26.481,27.754 26.835,27.4 27.683,28.249 27.33,28.603
  region: 26.958,27.312 27.312,26.958 28.143,27.789 27.789,28.143
  region: 27.418,26.852 27.772,26.499 28.603,27.33 28.249,27.683
  region: 27.878,26.393 28.231,26.039 29.062,26.87 28.709,27.224
  region: -25.739,-10.288 -26.181,-10.412 -27.011,-10.642 -29.327,-2.033 -28.019,-1.679
  region: -28.346,-10.969 -28.788,-11.093 -29.619,-11.323 -31.935,-2.714 -30.627,-2.36
Mechanical 8:
  lines w0.1: -41.001,6.416 -34.313,6.416 -33.87,6.859 -36.133,15.375 -37.449,16.691 cw(c0,0) -24.098,33.17 -16.666,25.739 -15.274,25.739 ; -41.001,6.418 ccw(c0,0) -40.71,-8.057 ccw(c-40.71,-8.058) -40.711,-8.057 -41.135,-8.481 ccw(c0,0) -39.915,-13.069 -39.298,-13.338 ; -39.321,-13.315 -39.298,-13.338 ; -31.352,-27.19 cw(c0,0) -39.298,-13.338 ; -31.35,-27.188 -28.557,-24.395 -25.527,-24.395 -23.405,-32.456 -23.405,-34.74 -25.366,-36.7 ; -25.416,-36.649 cw(c0,0) -23.008,38.207 ; -22.94,38.275 -13.939,29.274 -13.294,29.274 -9.546,33.022 -8.556,33.022 -6.435,30.901 -6.435,30.476 -8.202,28.709 -9.758,28.709 -12.728,25.739 -15.274,25.739 ; -22.859,38.699 -18.243,34.083 -17.895,34.083 -13.14,38.837 cw(c0,0) -6.351,40.505 ; -22.859,38.761 cw(c0,0) 27.392,35.702 26.163,32.81 28.779,30.193 24.678,26.092 28.709,22.062 29.698,23.052 31.961,23.052 32.244,22.769 30.901,21.425 29.628,21.425 28.638,20.435 27.577,21.496 26.799,20.718 21.85,25.668 20.718,24.537 19.587,25.668 21.142,27.224 20.718,27.648 23.759,30.688 21.355,33.093 22.496,34.277 ccw(c0,0) 3.037,40.887 3.082,40.842 1.061,38.82 -2.051,38.82 -2.404,39.174 -2.97,39.174 -3.889,38.254 -4.031,38.254 -6.316,40.54 ; -15.274,25.739 -15.274,25.739 ; -33.732,-29.177 cw(c0,0) 5.197,44.296 0,0 -33.732,-29.177